# Altium PCB PCB (STM8S003F3P6).PcbDoc
Units mm, origin at the board's own origin, x right, y up, seen from the top; angles counter-clockwise.
Board outline 50 x 50 mm, 2 copper layers (Top Layer, Bottom Layer); 45 components, 39 nets, 139 pads, 0 vias.
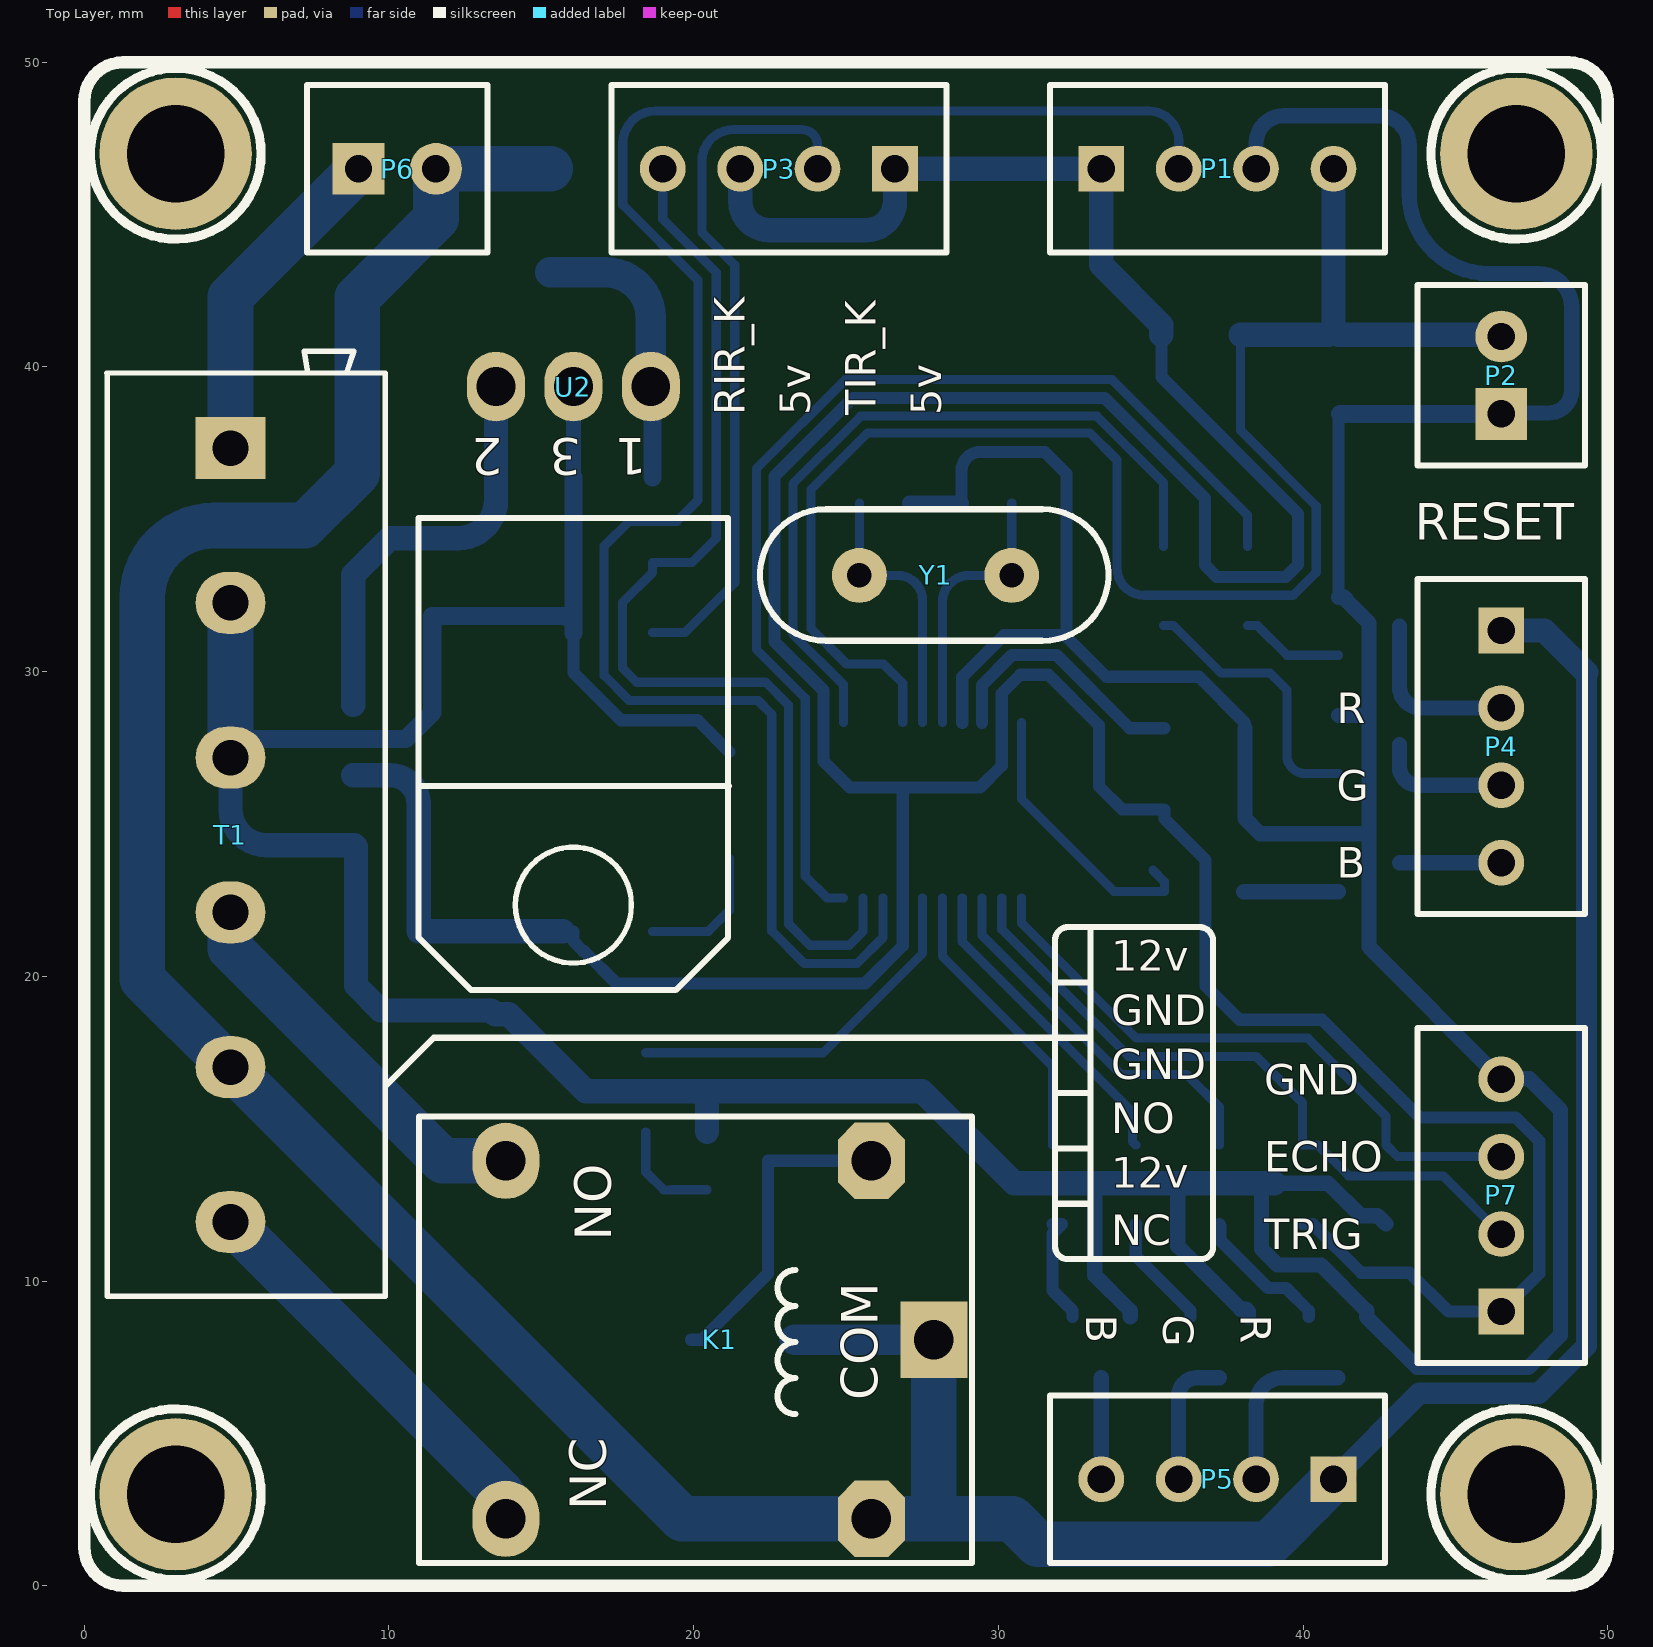
[diagram p0: Top Layer view]
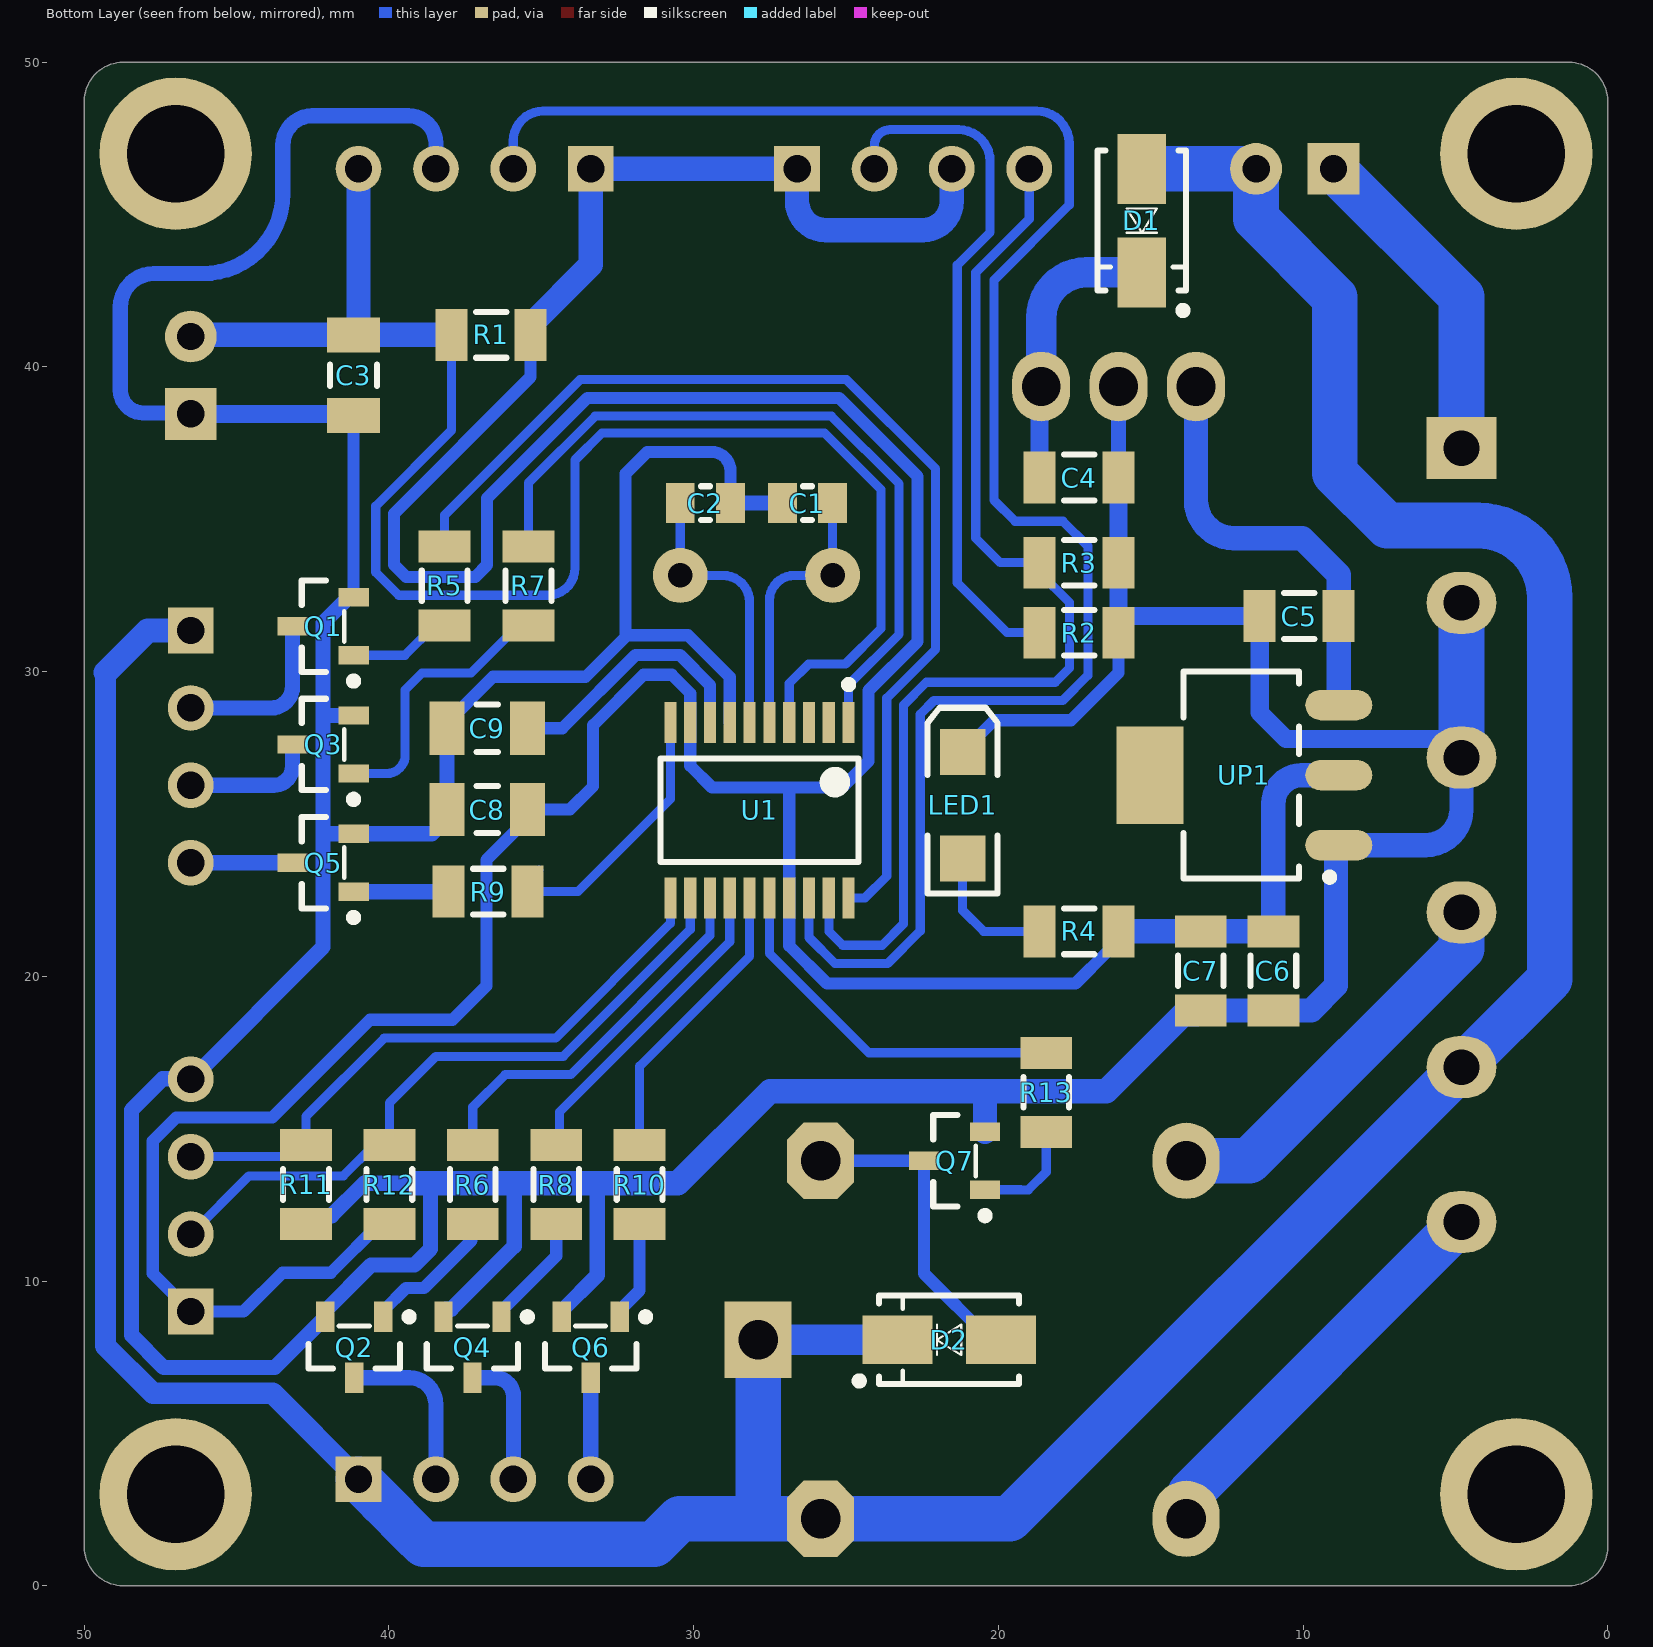
[diagram p1: Bottom Layer view, seen from below]
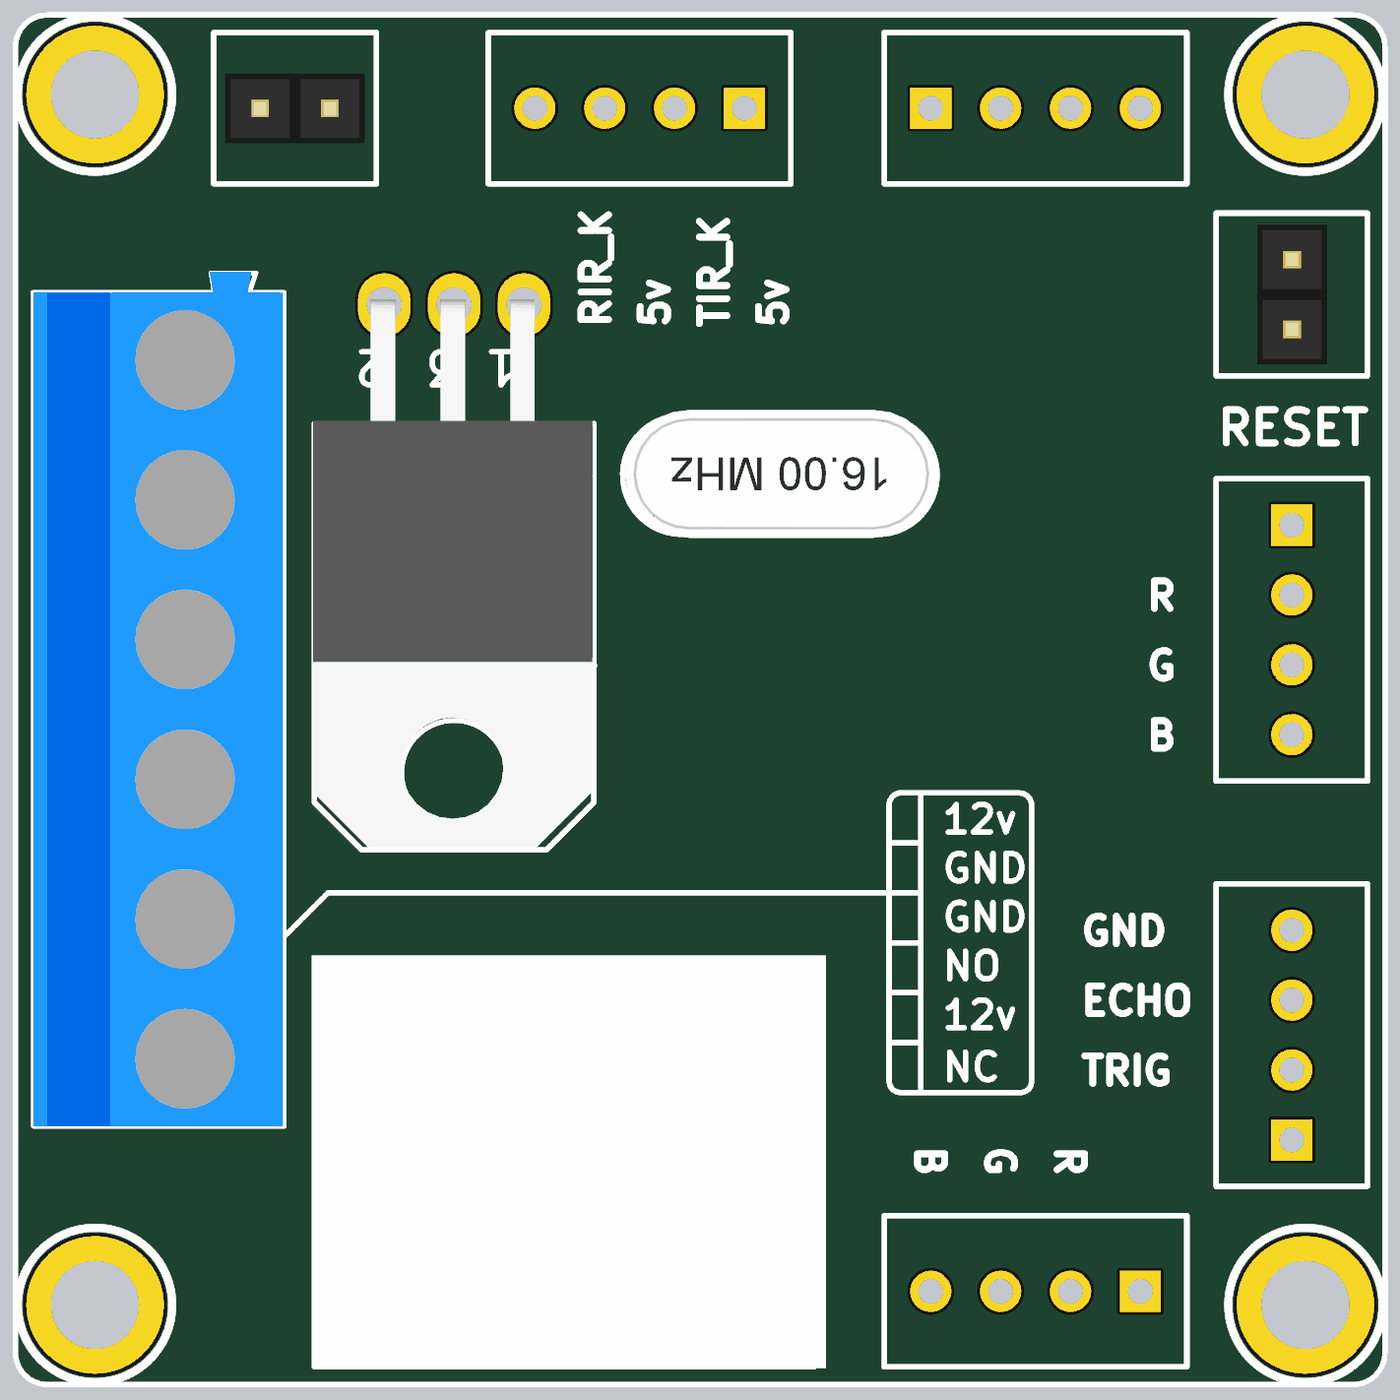
[diagram p2: 3D render of the assembled board from above, using the file's embedded part models]
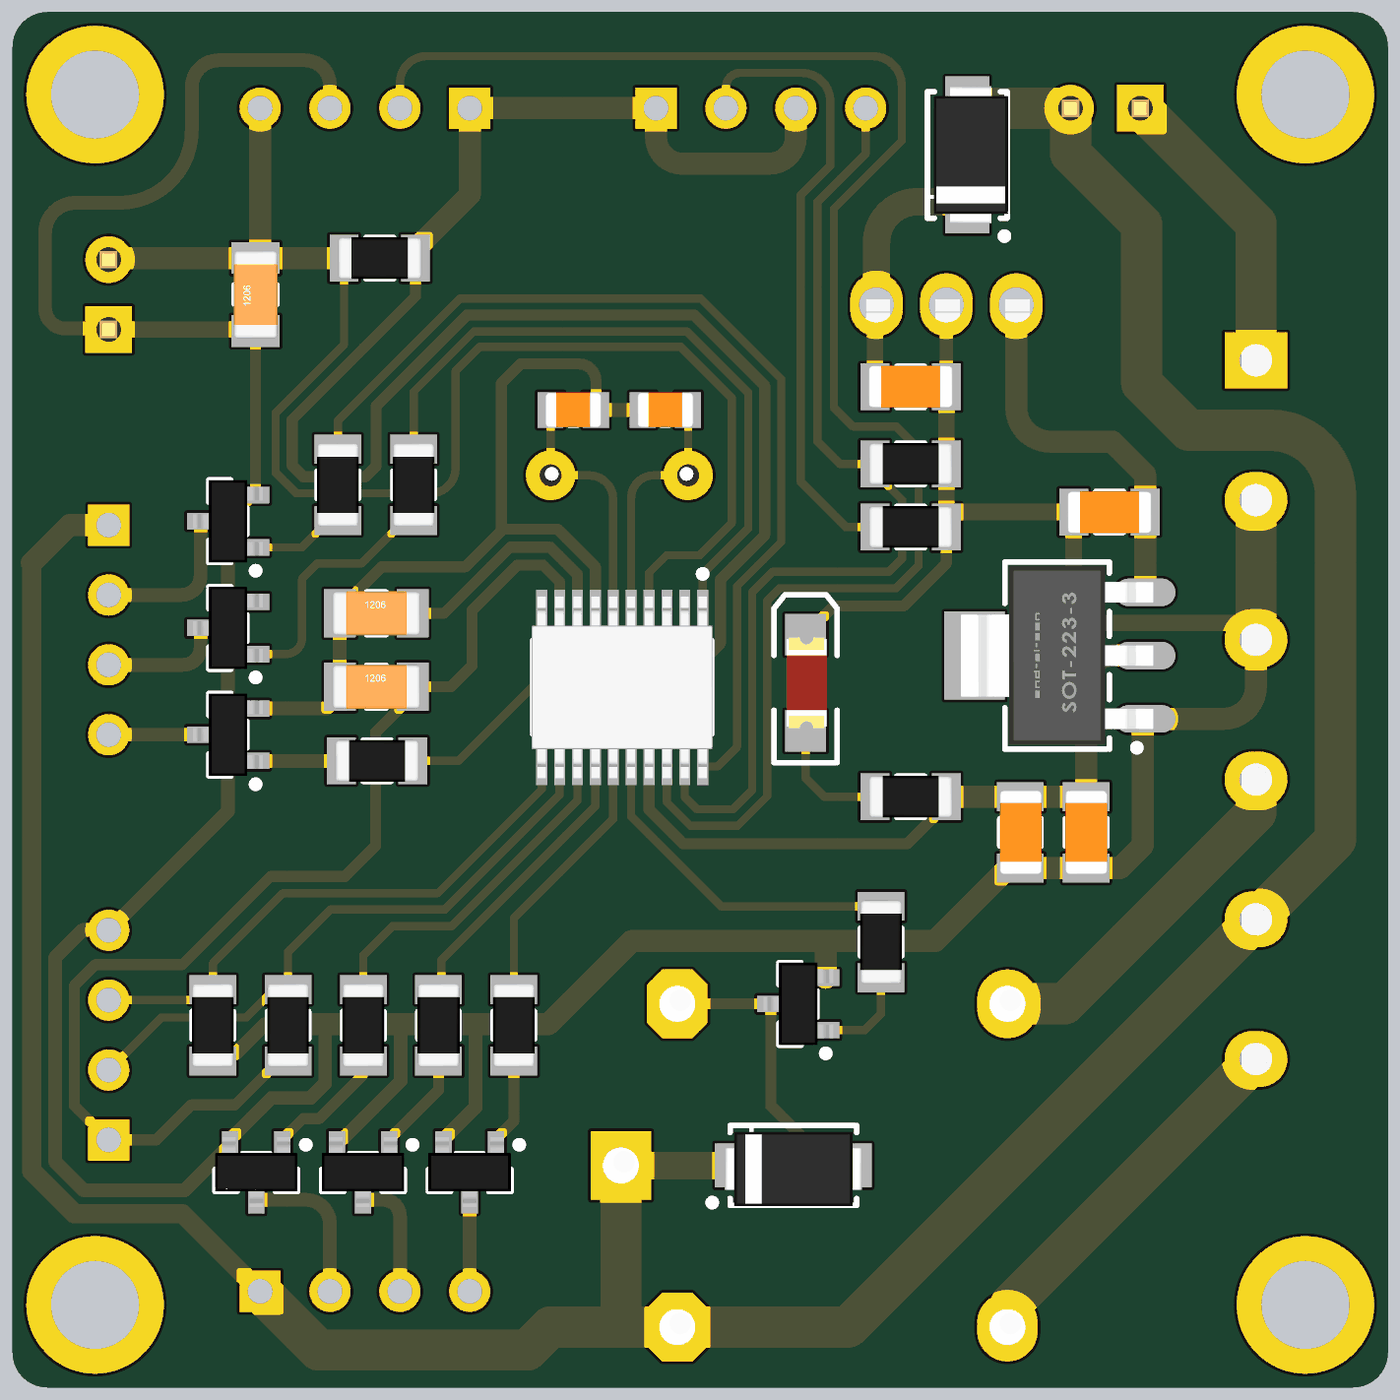
[diagram p3: 3D render of the assembled board from below, using the file's embedded part models]

## Layer stack, top to bottom
Top Solder: solder mask 0.0102, Solder Resist, Dk 3.5
Top Layer: signal copper 0.0356
Dielectric 1: dielectric 0.32, FR-4, Dk 4.8
Bottom Layer: signal copper 0.0356
Bottom Solder: solder mask 0.0102, Solder Resist, Dk 3.5

## Board outline
0,1.27 0,48.73 cw(c1.27,48.73) 1.27,50 48.73,50 cw(c48.73,48.73) 50,48.73 50,1.27 cw(c48.73,1.27) 48.73,0 1.27,0 cw(c1.27,1.27)

## Design rules (kind name [scope] priority, off if disabled: settings)
AssemblyTestPointUsage [All] p1 off:
AssemblyTestpoint [All] p1 off: testpointundercomponent=TRUE minsize=1.016 maxsize=2.54 preferedsize=1.524 minholesize=0 maxholesize=1.016 preferedholesize=0.813 testpointgrid=0.025 usegrid=TRUE gridtolerance=0 allowsidetop=TRUE allowsidebottom=TRUE
BoardOutlineClearance [All] p1 off: gap=0.3 ignorepadtopadclearanceinfootprint=FALSE
Clearance [All] p1: gap=0.3 ignorepadtopadclearanceinfootprint=FALSE except(0.25: Arc-Arc Arc-Track Arc-SMDPad Track-Track Track-SMDPad SMDPad-SMDPad)
FabricationTestPointUsage [All] p1 off: valid=0 allowmultiple=FALSE
FabricationTestpoint [All] p1 off: side=3 testpointundercomponent=TRUE minsize=1.016 maxsize=2.54 preferedsize=1.524 minholesize=0 maxholesize=1.016 preferedholesize=0.813 testpointgrid=0.025 allowsidetop=TRUE allowsidebottom=TRUE usegrid=TRUE gridtolerance=0
HoleSize [All] p1: absolutevalues=TRUE maxlimit=4 minlimit=0.025 maxpercent=80.000 minpercent=20.000
MinimumSolderMaskSliver [All] p1 off: minsoldermaskwidth=0.254
PolygonConnect [All] p1: connectstyle=Relief reliefconductorwidth=0.254 reliefentries=4 polygonreliefangle="90 Angle" airgapwidth=0.254
RoutingLayers [All] p1: top layer_v5=FALSE bottom layer_v5=TRUE
RoutingVias [All] p1: holewidth=0.711 width=1.27 viastyle="Through Hole" minholewidth=0.711 minwidth=1.27 maxholewidth=0.711 maxwidth=1.27
SilkToSilkClearance [All] p1 off: silktosilkclearance=0.254
SilkToSolderMaskClearance [IsPad] p1 off: minsilkscreentomaskgap=0.254 clearancetoexposedcopper=TRUE
SolderMaskExpansion [All] p1: expansion=0.102
Width [All] p1: maxlimit=2 minlimit=0.3 preferedwidth=0.5
21 further rules are at their usual default settings.

## Components (designator, comment, footprint, x,y, rotation, side; value= is the part's Value field where it differs from the comment)
C1 "20pF" CAP805 25.44,35.535 r0 bottom
C2 "20pF" CAP805 30.44,35.535 r180 bottom
C3 "100nF" Cap1206_(3216X15L) 41.164,39.73 r90 bottom
C4 "10uF" Cap1206_(3216X15) 16.053,36.373 r0 bottom
C5 "10uF" Cap1206_(3216X15) 11.423,31.826 r180 bottom
C6 "10uF" Cap1206_(3216X15) 10.973,18.88 r90 bottom
C7 "100nF" Cap1206_(3216X15) 13.359,18.88 r90 bottom
C8 "100nF" Cap1206_(3216X15L) 36.775,25.474 r180 bottom
C9 "680nF" Cap1206_(3216X15L) 36.775,28.143 r180 bottom
D1 "1n4007" DIOM4629X24N 15.291,44.806 r270 bottom
D2 "1n4007" DIOM4629X24N 21.615,8.07 r0 bottom
K1 "Standard Relay" "Milon Relay (18.85x15.35x15.70)" 20.858,8.07 r90 top
LED1 "Red" "LED SMD 1206" 21.171,25.616 r90 bottom
P1 "Program CN" HDR1X4 33.38,46.505 r0 top
P2 "Reset" "HDR 1X2 DIP TOP" 46.505,38.46 r90 top
P3 "IR CN" HDR1X4 26.607,46.505 r180 top
P4 "Show LED CN" HDR1X4 46.505,31.35 r270 top
P5 "Status LED CN" HDR1X4 41,3.495 r180 top
P6 "Power Key" "HDR 1X2 DIP TOP" 9,46.505 r0 top
P7 "Ultrasonic CN" HDR1X4 46.505,9 r90 top
Q1 "BC846" SOT23_L 42.164,31.49 r0 bottom
Q2 "BC846" SOT23_L 41.14,7.823 r270 bottom
Q3 "BC846" SOT23_L 42.164,27.61 r0 bottom
Q4 "BC846" SOT23_L 37.26,7.823 r270 bottom
Q5 "BC846" SOT23_L 42.164,23.73 r0 bottom
Q6 "BC846" SOT23_L 33.38,7.823 r270 bottom
Q7 "BC846" SOT23_L 21.438,13.945 r0 bottom
R1 "10K" "RES1206 _(3216X08L)" 37.948,41.055 r180 bottom
R2 "X" "RES1206 _(3216X08L)" 18.649,31.28 r180 bottom
R3 "X" "RES1206 _(3216X08L)" 18.649,33.578 r180 bottom
R4 "330R" "RES1206 _(3216X08L)" 18.649,21.476 r180 bottom value=330
R5 "330R" "RES1206 _(3216X08L)" 38.176,34.112 r270 bottom
R6 "330R" "RES1206 _(3216X08L)" 37.249,14.465 r270 bottom
R7 "330R" "RES1206 _(3216X08L)" 35.42,34.114 r270 bottom
R8 "330R" "RES1206 _(3216X08L)" 34.512,14.465 r270 bottom
R9 "330R" "RES1206 _(3216X08L)" 35.45,22.78 r0 bottom
R10 "330R" "RES1206 _(3216X08L)" 31.775,14.465 r270 bottom
R11 "10K" "RES1206 _(3216X08L)" 42.723,11.869 r90 bottom
R12 "10K" "RES1206 _(3216X08L)" 39.986,11.869 r90 bottom
R13 "330R" "RES1206 _(3216X08L)" 18.426,17.491 r270 bottom
T1 "Output" KF301-6PIN 4.798,37.338 r0 top
U1 "STM8S003F3P6" STMicroelectronics_STM8S003F3P6_0 27.838,25.451 r270 bottom
U2 "L78XXCV" "78XXCV - Right" 16.053,39.357 r180 top
UP1 "AMS1117" SOT223 12.026,26.605 r0 bottom
Y1 "16 MHz" "XTAL 16MHZ" 27.94,33.16 r180 top

## Footprints (in the part's own frame and the unit in brackets; to place one, negate y for a bottom-side part, rotate by r counter-clockwise, add the part's x,y. Pads: shape width x height; smd on the part's side, far side on the other; paste and mask are expansions set on the pad)
"78XXCV - Right" [mil] "Right Angle"
  oval 75x90 hole 50: 1(-100,0) 2(100,0) 3(0,0)
  silkscreen extent -201,170 200,780, body extent -198,-8 202,776, height 175
CAP805 [mm]
  rect 0.95x1.3 smd: 1(0,0) 2(1.65,0)
  silkscreen extent 0.67,-0.55 0.97,0.55, body extent -0.19,-0.64 1.84,0.63, height 0.65
Cap1206_(3216X15) [mm]
  rect 1.05x1.7 smd: 1(0,0) 2(2.596,0)
  silkscreen extent 0.8,-0.75 1.8,0.75, body extent -0.22,-0.77 2.82,0.75, height 0.75
Cap1206_(3216X15L) [mm] "Chip Capacitor, 2-Leads, Body 3.2x1.6mm, IPC High Density"
  rect 1.15x1.75 smd: 1(-1.325,0) 2(1.325,0)
  silkscreen extent -0.35,-0.77 0.35,0.77, body extent -1.6,-0.8 1.6,0.8, height 1
DIOM4629X24N [mm] "Molded Diode, 2-Leads, Body 4/60x2/90mm, IPC Medium Density-Design:Abbas Basereh"
  rect 2.3x1.6 smd: 1(-1.7,0) 2(1.7,0)
  silkscreen extent -2.3,-1.45 3.07,1.47, body extent -2.5,-1.22 2.5,1.48, height 2.2
HDR1X4 [mm] "Connector; Header; 4 Position"
  rect 1.5x1.5 hole 0.9: 1(0,0)
  round 1.5 hole 0.9: 2(2.54,0) 3(5.08,0) 4(7.62,0)
  silkscreen extent -1.69,-2.75 9.31,2.75
"HDR 1X2 DIP TOP" [mm] "Male Pin header 2 DIP top"
  rect 1.7x1.7 hole 0.9: 1(0,0)
  round 1.7 hole 0.9: 2(2.54,0)
  silkscreen extent -1.69,-2.75 4.23,2.75, body extent -1.27,-1.28 3.81,1.26, height 8.79
KF301-6PIN [mil]
  rect 90x80 hole 46: 1(0,0)
  oval 90x80 hole 46: 2(0,-200) 3(0,-400) 4(0,-600) 5(0,-800) 6(0,-1000)
  silkscreen extent -160,-1096 200,125, body extent -159,-1096 198,127, height 493
"LED SMD 1206" [mm]
  rect 1.5x1.5 smd: 1(-1.75,0) 2(1.75,0)
  silkscreen extent -2.9,-1.15 3.2,1.15, body extent -1.65,-0.76 1.65,0.69, height 1.36
"Milon Relay (18.85x15.35x15.70)" [mm]
  rect 2.5x2.2 hole 1.3: 1(0,-7.025)
  oval 2.5x2.2 hole 1.3: 2(-5.875,7.025) 3(5.875,7.025)
  oct 2.5x2.2 hole 1.3: 4(-5.875,-4.975) 5(5.875,-4.975)
  silkscreen extent -7.32,-8.27 7.32,9.87, body extent -7.37,-8.72 7.63,9.98, height 15.7
"RES1206 _(3216X08L)" [mm] "Chip Resistor, 2-Leads, Body 3.2x1.6mm, IPC High Density _ (0.125 W)"
  rect 1.05x1.7 smd: 1(0,0) 2(2.596,0)
  silkscreen extent 0.8,-0.75 1.8,0.75, body extent -0.23,-0.76 2.82,0.76, height 0.6
SOT23_L [mm] "SOT23, 3-Leads, Body 2.9x1.3mm, Pitch 0.95mm, Lead Span 2.3mm, IPC High Density"
  rect 1x0.6 smd: 1(-1,0.95) 2(-1,-0.95) 3(1,0)
  silkscreen extent -1.12,-1.5 0.7,1.92, body extent -1.27,-1.5 1.27,1.5, height 1.1
SOT223 [mm] "SOT223, 4-Leads, Body 6.5x3.5mm, Pitch 2.30mm-Designer"
  oval 2.2x1 smd: 1(-3.2,2.3) 2(-3.2,0) 3(-3.2,-2.3)
  rect 2.2x3.2 smd: 4(3,0)
  Top Layer pour cut-out: -1.7,3.556 1.7,3.556 1.7,-3.556 -1.7,-3.556
  silkscreen extent -3.02,-3.4 1.9,3.47, body extent -3.5,-3.25 3.5,3.25, height 1.7
STMicroelectronics_STM8S003F3P6_0 [mm]
  rect 1.35x0.4 smd paste+0 mask+0: 1(-2.875,2.925) 2(-2.875,2.275) 3(-2.875,1.625) 4(-2.875,0.975) 5(-2.875,0.325) 6(-2.875,-0.325) 7(-2.875,-0.975) 8(-2.875,-1.625) 9(-2.875,-2.275) 10(-2.875,-2.925) 11(2.875,-2.925) 12(2.875,-2.275) 13(2.875,-1.625) 14(2.875,-0.975) 15(2.875,-0.325) 16(2.875,0.325) 17(2.875,0.975) 18(2.875,1.625) 19(2.875,2.275) 20(2.875,2.925)
  silkscreen extent -4.25,-3.25 1.7,3.25, body extent -3.3,-3.3 3.3,3.3, height 1.18
"XTAL 16MHZ" [mm] "Crystal Oscillator"
  round 1.8 hole 0.8: 1(-2.5,0) 2(2.5,0)
  silkscreen extent -5.67,-2.18 5.76,2.15, body extent -5.68,-2.38 5.67,2.27, height 0.99

## Part data
C1 C2 C3 C4 C5 C6 C7 C8 C9: library part "CAP SMD PACKAGE", "TOTAL CAPACITOR SMD PACK", Data=2017-3-10, Desc.="CAP SMD TOTAL PACKAGES"
  C1 C2 C3 C7 C8 C9: Designer="Majid Derhambakhsh"
  C4 C5 C6: Designer="Abbas Basereh"
D1 D2: library part "1n4007 SMD M7", "Standard Rectifiers", Manufacturer="DC COMPONENTS", Data=16-12-2016, Designer="Abbas Basereh", Link=http://www.tme.eu/en/details/m7/smd-universal-diodes/dc-components/, Part. No=M7
K1: library part Relay, "Relay SPDT POWER NEEDLE", Company=E.P.I.L, Design_Date=2011/10/31, Designer="Ali Hafizi"
LED1: library part LED, Adding Date=1387/12/22, Color=Red, Designer="Saeid Jorablo", Organazation=ControTec, Size="SMD 1206"
P1 P3 P4 P5 P7: library part "Header 4", "Header, 4-Pin", LatestRevisionDate=17-Jul-2002, LatestRevisionNote="Re-released for DXP Platform.", Publisher="Altium Limited"
P2 P6: library part "Header 2", "Header, 2-Pin", LatestRevisionDate=17-Jul-2002, LatestRevisionNote="Re-released for DXP Platform.", Publisher="Altium Limited"
Q1 Q2 Q3 Q4 Q5 Q6 Q7: "NPN General-purpose Transistor", ComponentLink1Description="Manufacturer Link", ComponentLink1URL=http://www.semiconductors.philips.com/, ComponentLink2Description=Datasheet, ComponentLink2URL=http://www.semiconductors.philips.com/acrobat/datasheets/BC846_BC847_BC848_5.pdf, DatasheetVersion=4-Feb-2002, LatestRevisionDate=12-Dec-2006, LatestRevisionNote="IPC-7351 Footprint Added.", PackageDescription="3-Pin SOT-23 Package 0.95 mm Pitch, 2.3 mm Lead Span", PackageReference=SOT23, PackageVersion=2017-1-6, Published=2017-1-6, Publisher="Abbas Basereh"
R1 R2 R3 R4 R5 R6 R7 R8 R9 R10 R11 R12 R13: library part "RES SMD PACKAGE", "TOTAL SMD RESISTOR PACK", Data=2017-3-10, Desc.="RES SMD PAKAGES", Designer="Abbas Basereh"
T1: library part KF301-6Pin_Terminal, "Terminal 6 Pin 250VAC 16A"
U1: "IC STM8 STM8S Microcontroller IC 8-Bit 16MHz 8KB (8K x 8) FLASH 20-TSSOP", Digikey Part Number=497-11946-5-ND, Manufacturer=STMicroelectronics, Mouser Part Number=511-STM8S003F3P6, Package=TSSOP20, Temperature="-40°C to +85°C", Temperature Range High=+85°C, Temperature Range Low=-40°C, Voltage=2.95V~5.5V, Category 9E07530Daf1645C0="Semiconductors and Actives", Category Baf677Fc8B5C6131=Microcontrollers, Category Bfeb72E1862F642C="8 Bit", Category C8Ce05C4F1091309=Uncategorized, Category C8D405Def9791313=Microprocessors, ComponentLink1Description=Upverter, ComponentLink1URL=https://upverter.com/upn/revision/e4e66cee8d1878d0/, ComponentLink2Description=Datasheet, ComponentLink2URL=https://upverter.com/datasheet/126c1e634755f0662c16ca44ab91d2703942146a.pdf, Core Size=8-Bit, Digikey Description="IC STM8 STM8S Microcontroller IC 8-Bit 16MHz 8KB (8K x 8) FLASH 20-TSSOP", EEPROM Size="128 x 8", helpURL=https://upverter.com/upn/revision/e4e66cee8d1878d0/, Lead Free=yes, Number of I/O=16, Part Number=STM8S003F3P6, Price=0.582340417175, Program Memory Size="8KB (8K x 8)", RAM Size="1K x 8", RoHS=TRUE, Speed=16MHz, Supplier 1=Digi-Key, Supplier 2=Mouser, Supplier Part Number 1=497-11946-5-ND, Supplier Part Number 2=511-STM8S003F3P6
U2: "Fixed Voltage Regulator", Adding Date=1387/01/06, Company=ControTec, Designer="Saeid Jorablo"
UP1: "x.x Volt, 800mA Low-Dropout Linear Regulator, 4-pin SOT-223", Data=16-12-2016, Designer="Ali Hafizi"
Y1: library part XTAL, "XTAL Crystal", ComponentLink1Description=Datasheet, ComponentLink2Description=Reference, Design Date=2017-1-3, Designer="ABBAS BASEREH", Mounting Technology="Surface Mount\Through-Hole", Status=Unreleased

## Free pads (board coordinates)
  round 5 hole 3.2: 1(3,3) 2(3,47) 3(47,47) 4(47,3)

## Nets (pads, with @x,y where several pads share a name; then routed paths per layer and width w, separated by ;. In a path a pad name is that pad's centre, name@x,y a point inside that pad or via, vN(x,y) a via of type N, cw(c..) or ccw(c..) an arc to the next point about the centre after c; other vN are vias at no path point)
5v: C6.2 C7.2 C8.2 P1.1 P3.1 P3.3 P7.1 R1.2 R4.2 R12.1 U1.9 U1.17 UP1.2 | length 142.6
  Bottom Layer w0.4: R4.2 16.053,21.151 16.378,20.826 16.409,20.826 17.466,19.769 25.626,19.769 26.863,21.006 U1.17 26.863,26.178 26.886,26.2 ; R1.2 35.352,39.67 39.837,35.184 39.837,33.51 39.433,33.106 37.171,33.106 36.779,33.498 36.779,35.689 33.482,38.987 25.233,38.987 22.657,36.411 22.657,30.986 24.263,29.379 24.263,27.057 25.121,26.2 26.886,26.2 ; R12.1 40.311,11.869 41.908,10.272 43.5,10.272 44.772,9 P7.1 47.755,10.25 47.755,14.598 46.983,15.37 43.829,15.37 40.626,18.574 37.916,18.574 36.805,19.685 36.805,23.82 35.45,25.174 C8.2 34.064,25.474 33.299,26.238 33.299,28.24 31.644,29.896 30.721,29.896 30.113,29.288 30.113,28.918 U1.9 30.113,26.913 29.4,26.2 26.886,26.2
  Bottom Layer w0.8: UP1.2 10.031,26.605 cw(c10.031,25.664) 10.973,25.664 C6.2 C7.2 R4.2@15.697,21.476 ; P3.3 21.526,45.451 ccw(c22.489,45.451) 22.489,44.488 25.654,44.488 ccw(c25.654,45.441) 26.607,45.441 P3.1 P1.1 33.38,43.352 35.352,41.38 R1.2
8v: C5.2 U2.2 UP1.3 | length 13.9
  Bottom Layer w0.8: UP1.3 C5.2 8.827,33.186 10.023,34.382 12.268,34.382 ccw(c12.268,35.627) 13.513,35.627 U2.2
GND: C1.2 C2.2 C3.1 C4.1 C5.1 C6.1 C7.1 C8.1 C9.1 LED1.2 P1.3 P2.1 P7.4 Q1.2 Q2.2 Q3.2 Q4.2 Q5.2 Q6.2 Q7.2 R2.2 R3.2 R11.1 T1.2 T1.3 U1.7 U2.3 UP1.1 | length 203.7
  Bottom Layer w0.4: R2.2 16.053,29.967 17.615,28.405 20.132,28.405 LED1.2 ; C2.2 28.79,36.588 cw(c29.415,36.588) 29.415,37.213 31.521,37.213 32.233,36.501 32.233,31.145 ; U1.7 28.813,29.826 30.183,31.196 32.182,31.196 32.233,31.145 ; C9.1 38.1,28.315 36.582,29.832 33.546,29.832 32.233,31.145 ; Q1.2 C3.1 C3.1@41.219,38.46
  Bottom Layer w0.5: C4.1 U2.3 ; C1.2 C2.2 ; 33.096,13.208 33.162,13.142 33.162,10.191 34.33,9.023 Q6.2 ; 35.89,13.208 35.89,11.143 37.96,9.073 38.139,9.073 38.21,9.002 Q4.2 ; C9.1 C8.1 38.1,25.174 38.594,24.68 Q5.2 42.092,24.68 42.164,24.752 ; P1.3 38.46,47.34 cw(c39.367,47.34) 39.367,48.247 42.514,48.247 cw(c42.514,47.277) 43.485,47.277 43.485,45.694 ccw(c46.113,45.694) 46.113,43.066 47.72,43.066 cw(c47.72,41.967) 48.819,41.967 48.819,39.242 cw(c48.071,39.242) 48.071,38.494 46.539,38.494 ccw(c46.539,38.46) P2.1 ; 38.636,13.208 38.636,11.046 39.159,10.523 40.59,10.523 42.09,9.023 Q2.2 43.75,7.163 47.396,7.163 48.455,8.222 48.455,15.616 47.434,16.637 46.522,16.637 P7.4 42.164,20.961 42.164,24.752 ; 39.065,13.208 40.818,13.208 41.881,12.144 42.448,12.144 R11.1 ; Q3.2 42.111,28.56 42.164,28.613 ; Q1.2 41.364,32.44 41.414,32.39 41.414,32.348 42.164,31.598 42.164,28.613 ; 42.164,24.752 42.164,28.613
  Bottom Layer w0.6: T1.3 cw(c5.395,27.178) T1.3@5.395,27.775 ; T1.3@4.798,27.788 10.554,27.788 11.423,28.657 C5.1 15.828,31.826 R2.2@16.053,31.601 ; R2.2 R2.2@16.053,31.601 ; C4.1 R3.2 R2.2@16.053,31.601 ; C3.1@41.219,38.46 P2.1
  Bottom Layer w0.8: T1.3 4.798,25.49 ccw(c5.982,25.49) 5.982,24.305 UP1.1 cw(c8.826,24.216) 8.915,24.216 8.915,19.698 9.733,18.88 C6.1 C7.1 13.484,18.755 13.935,18.755 16.459,16.231 20.447,16.231 ; Q7.2 20.438,16.221 20.447,16.231 ; 39.065,13.208 38.636,13.208 35.89,13.208 33.096,13.208 30.518,13.208 27.495,16.231 20.447,16.231
  Bottom Layer w1.5: T1.3@4.798,27.788 T1.2
MCU_XI: C1.1 U1.5 Y1.2 | length 8.9
  Bottom Layer w0.3: C1.1 Y1.2 26.688,33.16 cw(c26.688,32.335) 27.513,32.335 U1.5
MCU_XO: C2.1 U1.6 Y1.1 | length 9.1
  Bottom Layer w0.3: U1.6 28.163,32.282 cw(c29.041,32.282) 29.041,33.16 Y1.1 C2.1
NetC4_2: C4.2 D1.2 U2.1 | length 9.4
  Bottom Layer w0.6: U2.1 18.649,39.301 C4.2
  Bottom Layer w1: D1.2 17.105,43.106 cw(c17.105,41.618) 18.593,41.618 U2.1
NetD2_1: D2.1 K1.5 Q7.3 | length 10.5
  Bottom Layer w0.4: D2.1 20.265,8.07 22.438,10.242 Q7.3 K1.5
NetLED1_1: LED1.1 R4.1 | length 4.5
  Bottom Layer w0.3: R4.1 20.485,21.476 21.171,22.162 LED1.1
NetP4_2: P4.2 Q1.3 | length 5.7
  Bottom Layer w0.5: Q1.3 43.164,29.511 ccw(c43.865,29.511) 43.865,28.81 P4.2
NetP4_3: P4.3 Q3.3 | length 4.4
  Bottom Layer w0.5: Q3.3 43.164,26.891 ccw(c43.785,26.891) 43.785,26.27 P4.3
NetP4_4: P4.4 Q5.3 | length 3.3
  Bottom Layer w0.5: Q5.3 P4.4
NetP5_2: P5.2 Q2.3 | length 5.6
  Bottom Layer w0.5: P5.2 38.46,5.948 cw(c39.335,5.948) 39.335,6.823 Q2.3
NetP5_3: P5.3 Q4.3 | length 4.4
  Bottom Layer w0.5: P5.3 35.916,3.499 35.916,6.223 cw(c36.516,6.223) 36.516,6.823 Q4.3
NetP5_4: P5.4 Q6.3 | length 3.3
  Bottom Layer w0.5: P5.4 Q6.3
NetP6_1: P6.1 T1.1 | length 10.9
  Bottom Layer w1.5: T1.1 4.798,42.303 P6.1
NetQ1_1: Q1.1 R5.2 | length 3.4
  Bottom Layer w0.3: R5.2 38.501,31.516 39.477,30.54 Q1.1
NetQ2_1: Q2.1 R6.2 | length 4.6
  Bottom Layer w0.4: R6.2 37.294,11.824 37.294,11.328 38.849,9.773 39.44,9.773 40.19,9.023 Q2.1
NetQ3_1: Q3.1 R7.2 | length 9.1
  Bottom Layer w0.3: R7.2 35.745,31.518 37.304,29.959 38.913,29.959 39.472,29.4 39.472,27.251 ccw(c40.063,27.251) 40.063,26.66 Q3.1
NetQ4_1: Q4.1 R8.2 | length 3.8
  Bottom Layer w0.4: R8.2 34.512,10.821 36.31,9.023 Q4.1
NetQ5_1: Q5.1 R9.2 | length 3.1
  Bottom Layer w0.5: R9.2 Q5.1
NetQ6_1: Q6.1 R10.2 | length 3.8
  Bottom Layer w0.4: R10.2 32.087,11.869 31.775,11.557 31.775,9.69 32.43,9.036 Q6.1
NetQ7_1: Q7.1 R13.2 | length 3.6
  Bottom Layer w0.3: R13.2 18.426,13.578 19.015,12.989 19.263,12.989 19.269,12.995 Q7.1
NRST: C3.2 P1.4 P2.2 R1.1 U1.4 | length 54.5
  Bottom Layer w0.3: U1.4 26.863,29.614 26.226,30.251 25.017,30.251 23.857,31.412 23.857,35.985 25.709,37.837 33.005,37.837 33.896,36.946 33.896,33.401 ccw(c34.791,33.401) 34.791,32.506 39.682,32.506 40.437,33.261 40.437,35.433 37.948,37.922 R1.1
  Bottom Layer w0.8: R1.1 40.836,41.055 C3.2@41,41.219 ; P1.4 C3.2@41,41.219 ; P2.2 46.45,41.055 C3.2 C3.2@41,41.219
RELAY: R13.1 U1.16 | length 12.3
  Bottom Layer w0.3: R13.1 24.247,17.491 27.513,20.757 U1.16
RELAY_NC: K1.2 T1.6 | length 13.5
  Bottom Layer w1.5: T1.6 13.699,3.037 13.699,2.329 K1.2
RELAY_NO: K1.3 T1.4 | length 13.1
  Bottom Layer w1.5: T1.4 4.798,20.907 11.76,13.945 K1.3
RIR_K: P3.4 R3.1 U1.19 | length 36.3
  Bottom Layer w0.3: P3.4 18.986,44.856 20.742,43.101 20.742,34.382 19.938,33.578 R3.1 18.649,33.253 17.662,32.266 17.662,30.126 18.133,29.654 22.362,29.654 23.113,28.903 23.113,21.721 23.816,21.018 25.108,21.018 25.563,21.474 U1.19
SHOW_LED_B: R9.1 U1.10 | length 9.3
  Bottom Layer w0.3: U1.10 30.763,25.815 33.798,22.78 R9.1 35.45,23.105 R9.1@35.075,23.48
SHOW_LED_G: R7.1 U1.1 | length 24.6
  Bottom Layer w0.3: U1.1 24.913,29.578 23.257,31.234 23.257,36.162 25.481,38.387 33.233,38.387 35.42,36.2 R7.1
SHOW_LED_R: R5.1 U1.20 | length 35.8
  Bottom Layer w0.3: U1.20 24.376,22.576 23.663,23.289 23.663,29.131 22.057,30.737 22.057,36.659 24.984,39.587 33.73,39.587 38.176,35.141 R5.1
SIR_K: P3.2 R2.1 | length 23.1
  Bottom Layer w0.3: R2.1 19.71,31.28 21.349,32.918 21.349,43.343 20.269,44.422 20.269,46.749 cw(c21.31,46.749) 21.31,47.79 23.552,47.79 cw(c23.552,47.276) 24.066,47.276 P3.2
ST_LINK_SWIM: P1.2 U1.18 | length 59.9
  Bottom Layer w0.3: U1.18 26.213,21.275 25.356,20.419 23.638,20.419 22.563,21.493 22.563,28.604 22.113,29.055 17.885,29.055 17.062,29.877 17.062,34.13 17.074,34.13 17.882,34.938 19.448,34.938 20.142,35.632 20.142,42.852 17.674,45.321 17.674,47.334 cw(c18.739,47.334) 18.739,48.4 34.94,48.4 cw(c34.94,47.419) 35.92,47.419 P1.2
STAT_LED_B: R10.1 U1.15 | length 9.6
  Bottom Layer w0.3: U1.15 28.163,20.66 31.775,17.048 R10.1
STAT_LED_G: R8.1 U1.14 | length 10.5
  Bottom Layer w0.3: U1.14 28.813,21.136 34.408,15.542 34.408,14.57 R8.1
STAT_LED_R: R6.1 U1.13 | length 12.6
  Bottom Layer w0.3: U1.13 29.463,21.344 34.034,16.774 36.185,16.774 37.249,15.71 R6.1
USONIC_ECHO: P7.3 R11.2 U1.11 | length 20.3
  Bottom Layer w0.3: U1.11 30.763,21.741 34.531,17.974 40.154,17.974 42.723,15.405 R11.2 43.098,14.09 46.495,14.09 P7.3
USONIC_TRIG: P7.2 R12.2 U1.12 | length 22.4
  Bottom Layer w0.3: U1.12 30.113,21.543 34.283,17.374 38.456,17.374 39.986,15.843 R12.2 40.48,14.465 41.496,13.449 44.596,13.449 P7.2
VCAP: C9.2 U1.8 | length 8.6
  Bottom Layer w0.4: U1.8 29.463,29.557 30.452,30.546 31.913,30.546 34.315,28.143 C9.2
VCC: D1.1 D2.2 K1.1 K1.4 P4.1 P5.1 P6.2 T1.5 | length 130.2
  Bottom Layer w0.7: P5.1 43.818,6.313 47.748,6.313 49.305,7.87 49.305,29.968 49.3,29.973
  Bottom Layer w0.8: P4.1 47.923,31.35 49.3,29.973
  Bottom Layer w1: D2.2 K1.1
  Bottom Layer w1.5: D1.1 P6.2 11.54,44.865 8.954,42.278 8.954,36.512 7.239,34.798 4.267,34.798 ccw(c4.267,32.436) 1.905,32.436 1.905,19.911 T1.5 19.621,2.195 K1.4 27.737,2.195 ; K1.1 27.883,2.341 27.737,2.195 ; P5.1 40.26,2.755 40.26,2.749 39.206,1.695 39.2,1.695 38.864,1.359 31.293,1.359 30.457,2.195 27.737,2.195
pads on no net: U1.2 U1.3 UP1.4

## Silkscreen, mask and mechanical layers (free items; w line width, h text height)
Top Overlay:
  circle w0.3: c3,47 r2.804
  circle w0.3: c3,3 r2.804
  circle w0.3: c47,3 r2.804
  circle w0.3: c47,47 r2.804
  lines w0.2: 9.893,16.408 11.468,17.983 31.89,17.983 33.02,17.983 ; 31.864,12.535 33.02,12.535 ; 31.915,14.351 33.02,14.351 ; 31.935,19.799 33.02,19.799 ; 31.966,16.167 33.02,16.167 ; 33.02,10.731 33.02,21.59 ; 31.864,11.134 ccw(c32.279,11.134) 32.279,10.719 36.654,10.719 ccw(c36.654,11.11) 37.046,11.11 37.046,20.079 37.046,21.17 ccw(c36.601,21.17) 36.601,21.615 32.294,21.615 ccw(c32.294,21.185) 31.864,21.185 31.864,20.109 31.864,11.134
  lines w0.4: 0,1.27 ccw(c1.27,1.27) 1.27,0 5,0 45,0 48.73,0 ccw(c48.73,1.27) 50,1.27 50,5 50,45 50,48.73 ccw(c48.73,48.73) 48.73,50 45,50 5,50 1.27,50 ccw(c1.27,48.73) 0,48.73 0,45 0,5 0,1.27
  text "RIR_K" at 21.679,38.417 h1 r90
  text "5v" at 23.829,38.417 h1 r90
  text "TIR_K" at 25.98,38.417 h1 r90
  text "5v" at 28.13,38.417 h1 r90
  text "RESET" at 43.675,34.328 h1.2
  text "R" at 41.105,28.31 h1
  text "G" at 41.105,25.77 h1
  text "B" at 41.105,23.23 h1
  text "12v" at 33.699,20.18 h1
  text "GND" at 33.699,18.402 h1
  text "GND" at 33.699,16.624 h1
  text "GND" at 38.722,16.12 h1
  text "NO" at 33.699,14.846 h1
  text "ECHO" at 38.722,13.58 h1
  text "12v" at 33.699,13.068 h1
  text "NC" at 33.699,11.176 h1
  text "TRIG" at 38.722,11.04 h1
  text "B" at 32.88,8.895 h1 r270
  text "G" at 35.42,8.895 h1 r270
  text "R" at 37.96,8.895 h1 r270

## Dimensions
48.73,50 to 48.73,0 on Top Overlay
0,48.73 to 50,48.73 on Top Overlay

## Text inside footprints (layer, text, board x,y; h text height)
K1: Top Overlay "NC" at 17.124,2.482 h1.2 r90; Top Overlay "NO" at 17.302,11.321 h1.2 r90; Top Overlay "COM" at 26.039,6.089 h1.2 r90
U2: Top Overlay "3" at 16.307,37.657 h1.2 r180; Top Overlay "2" at 13.741,37.657 h1.2 r180; Top Overlay "1" at 18.466,37.657 h1.2 r180